# Altium PCB PCB.PcbDoc (part 1 of 2)
Units mm, origin at the board's own origin, x right, y up, seen from the top; angles counter-clockwise.
Board outline 210 x 83 mm, 4 copper layers (Top Layer, Inner Top, Inner Bottom, Bottom Layer), stack 1.536 mm thick; 158 components, 82 nets, 475 pads, 389 vias.
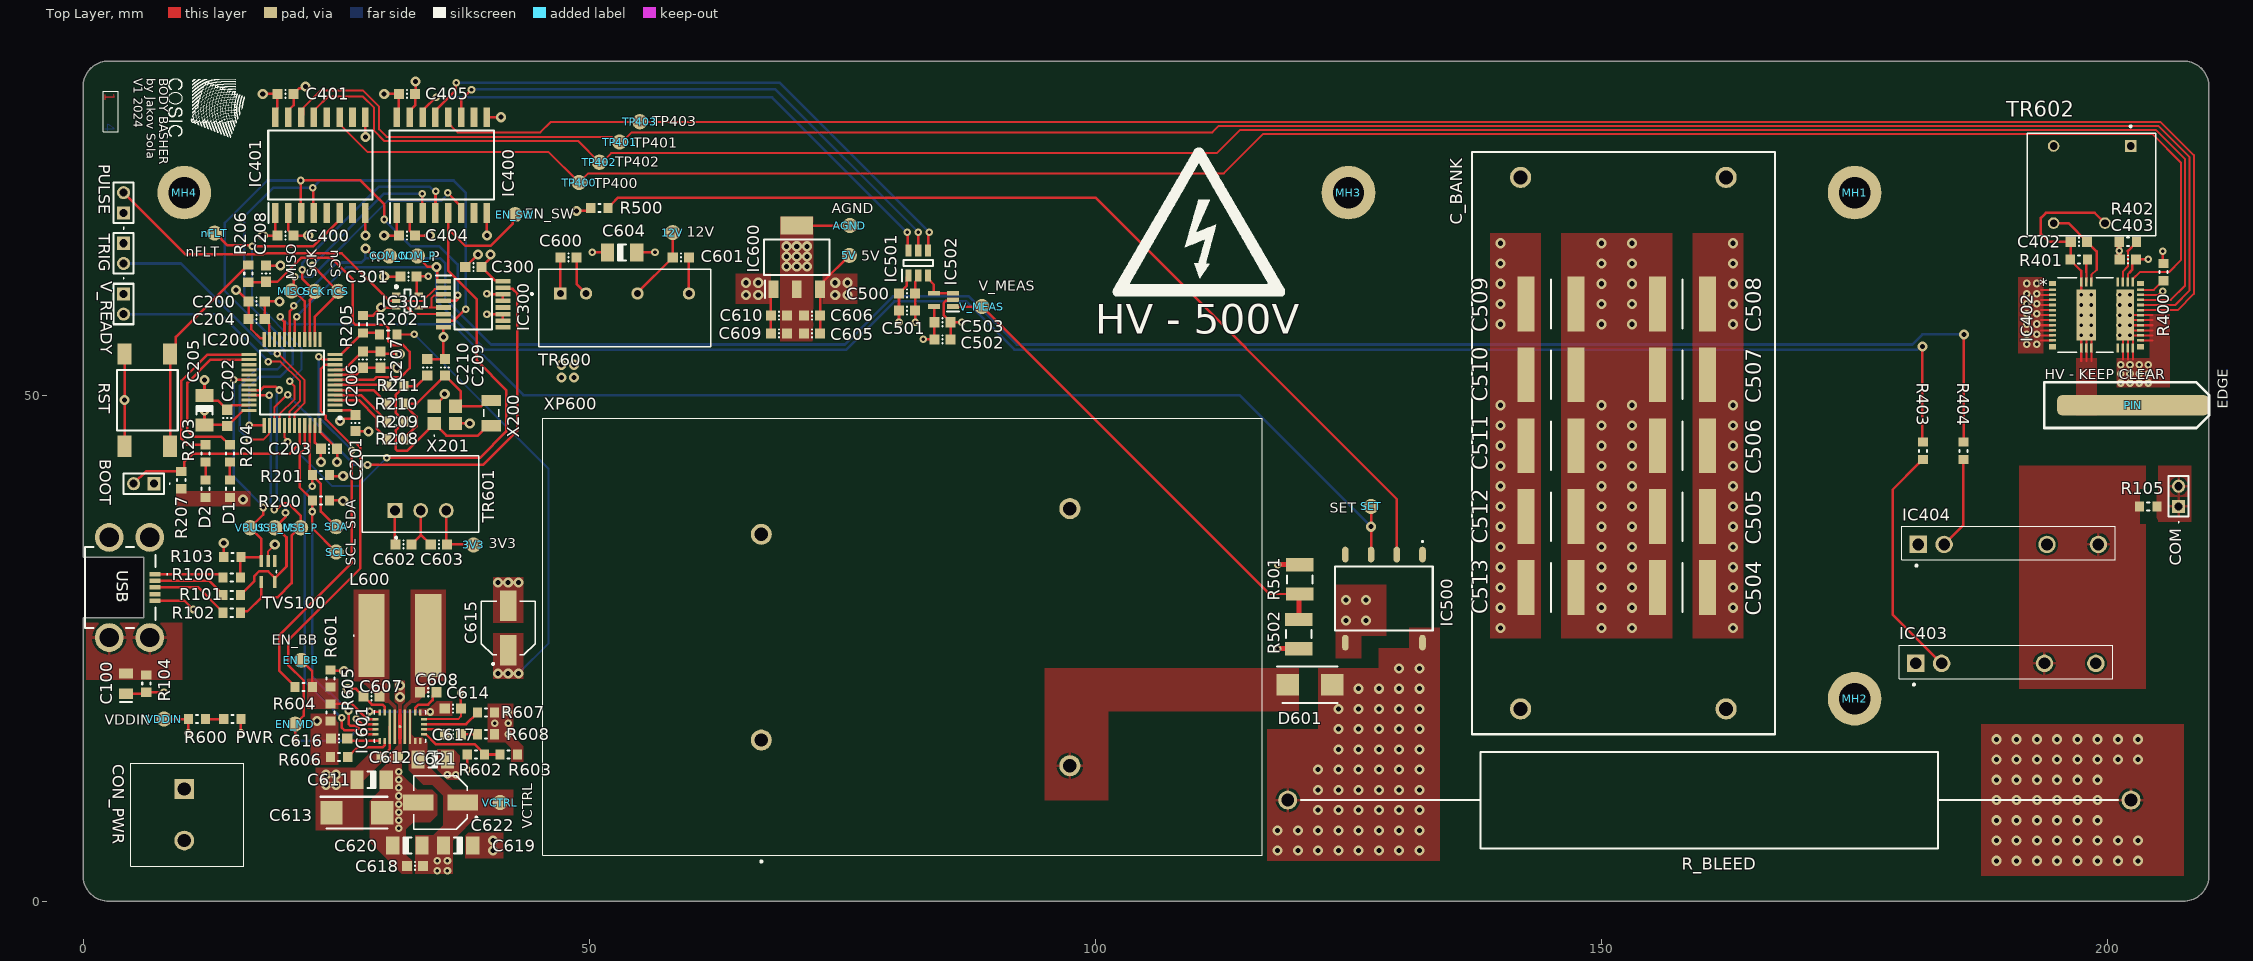
[diagram p0: Top Layer view]
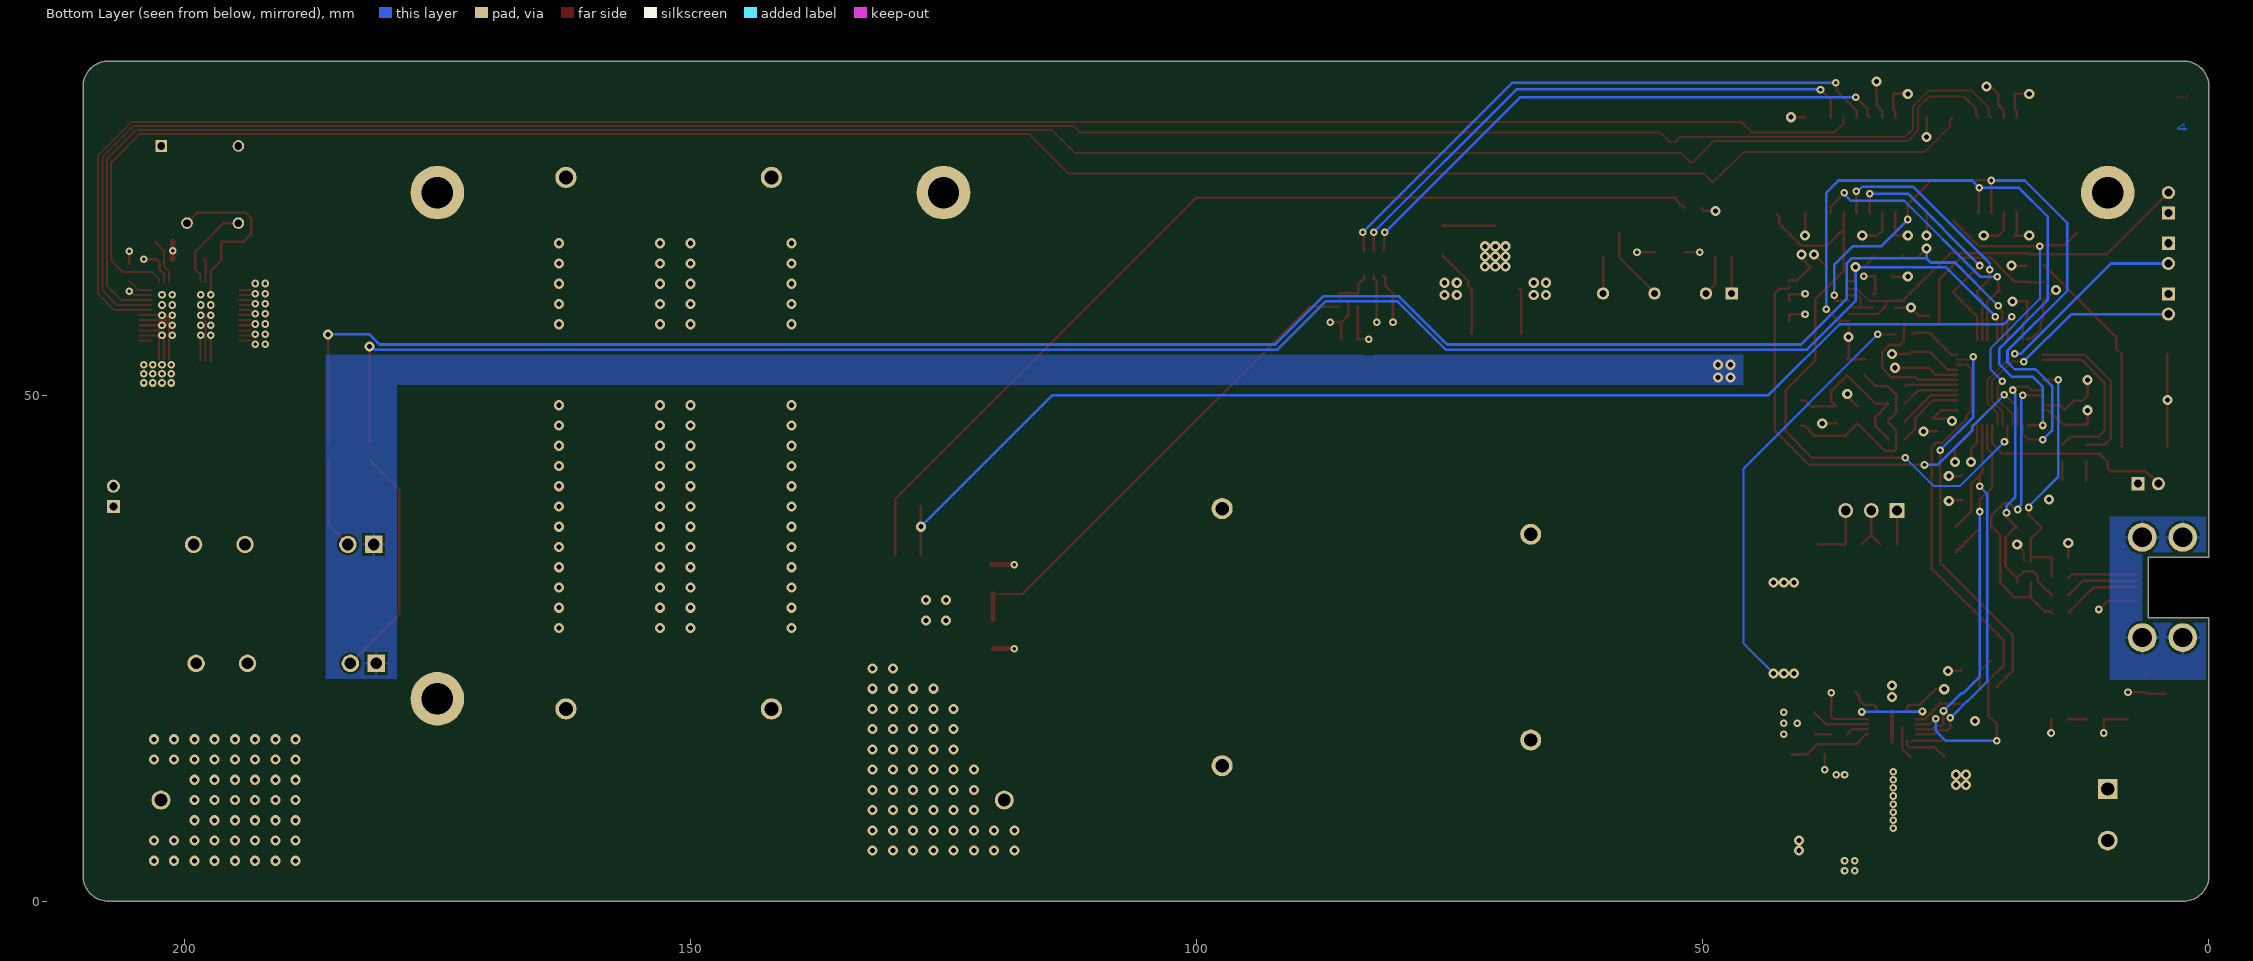
[diagram p1: Bottom Layer view, seen from below]
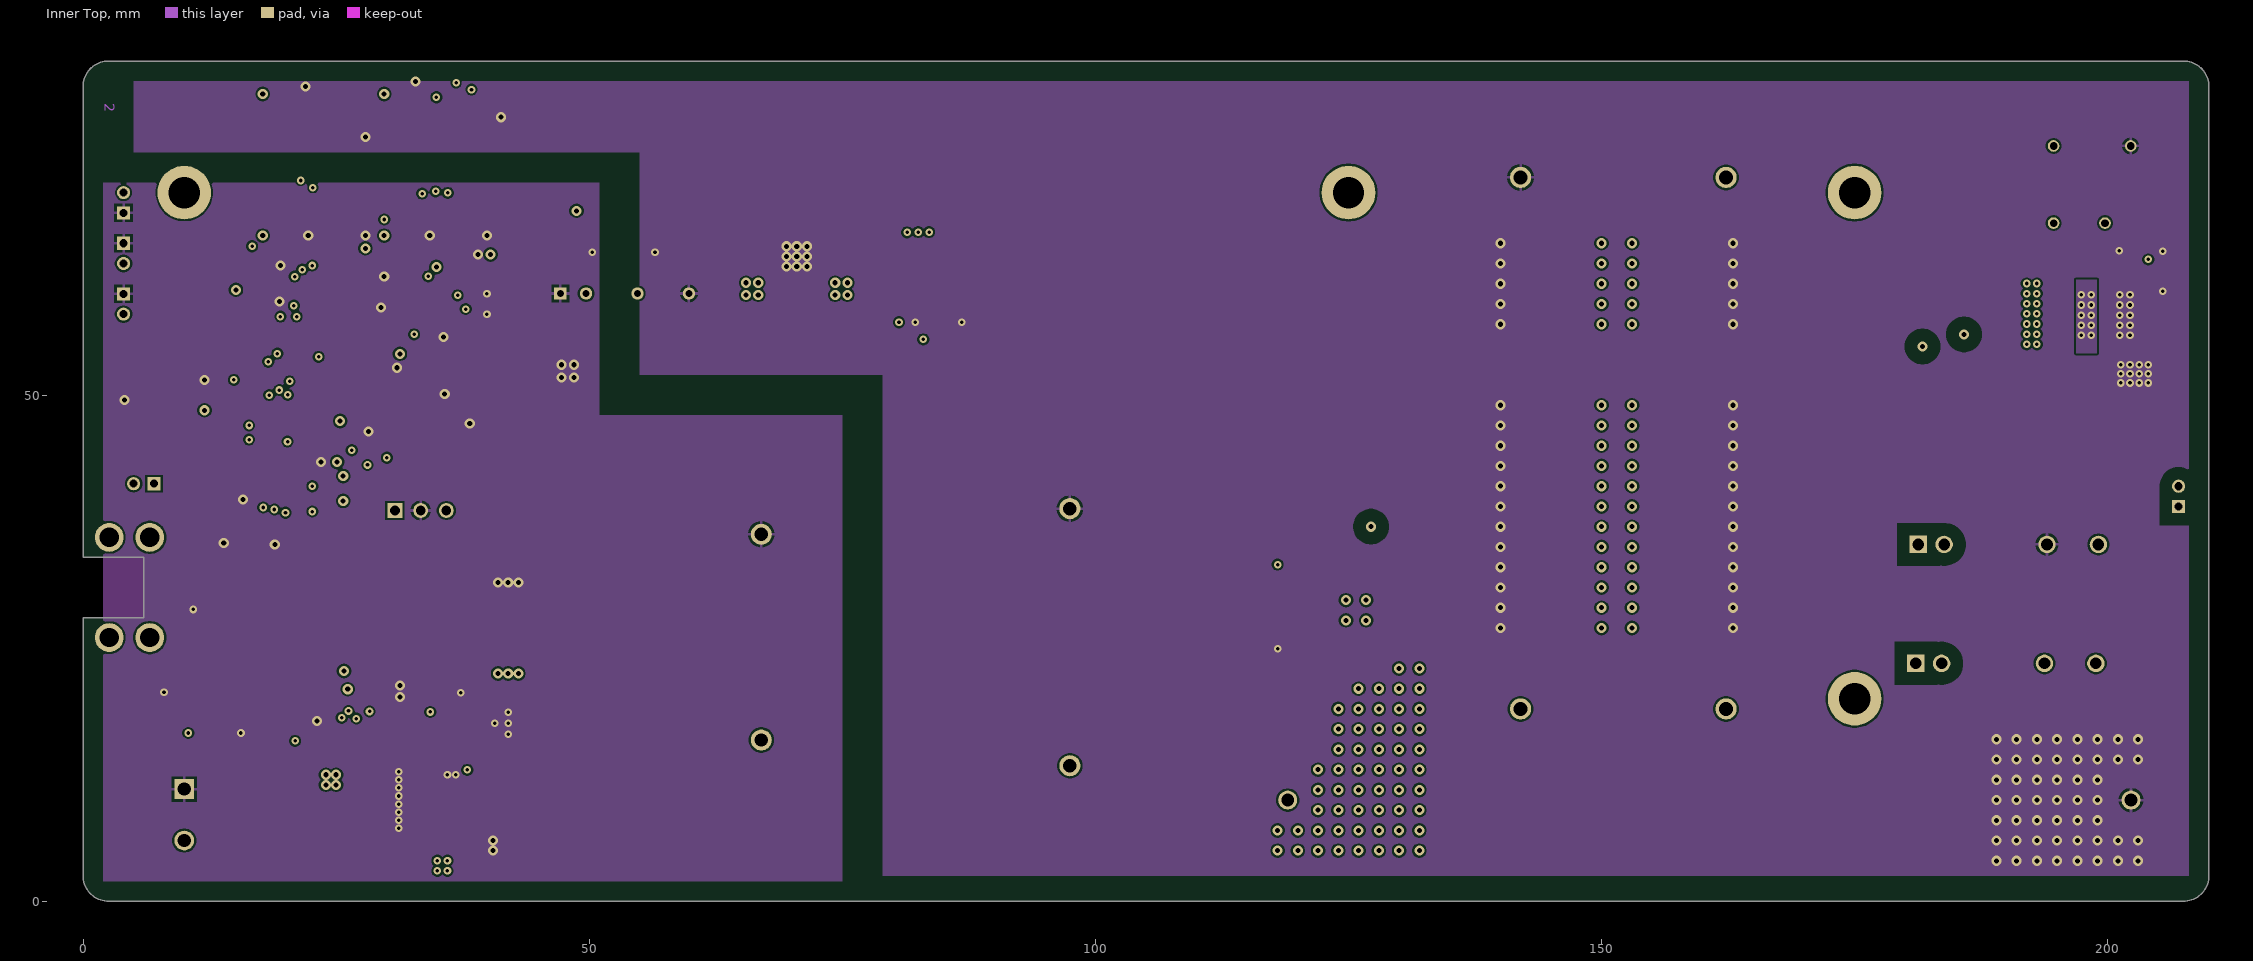
[diagram p2: Inner Top]
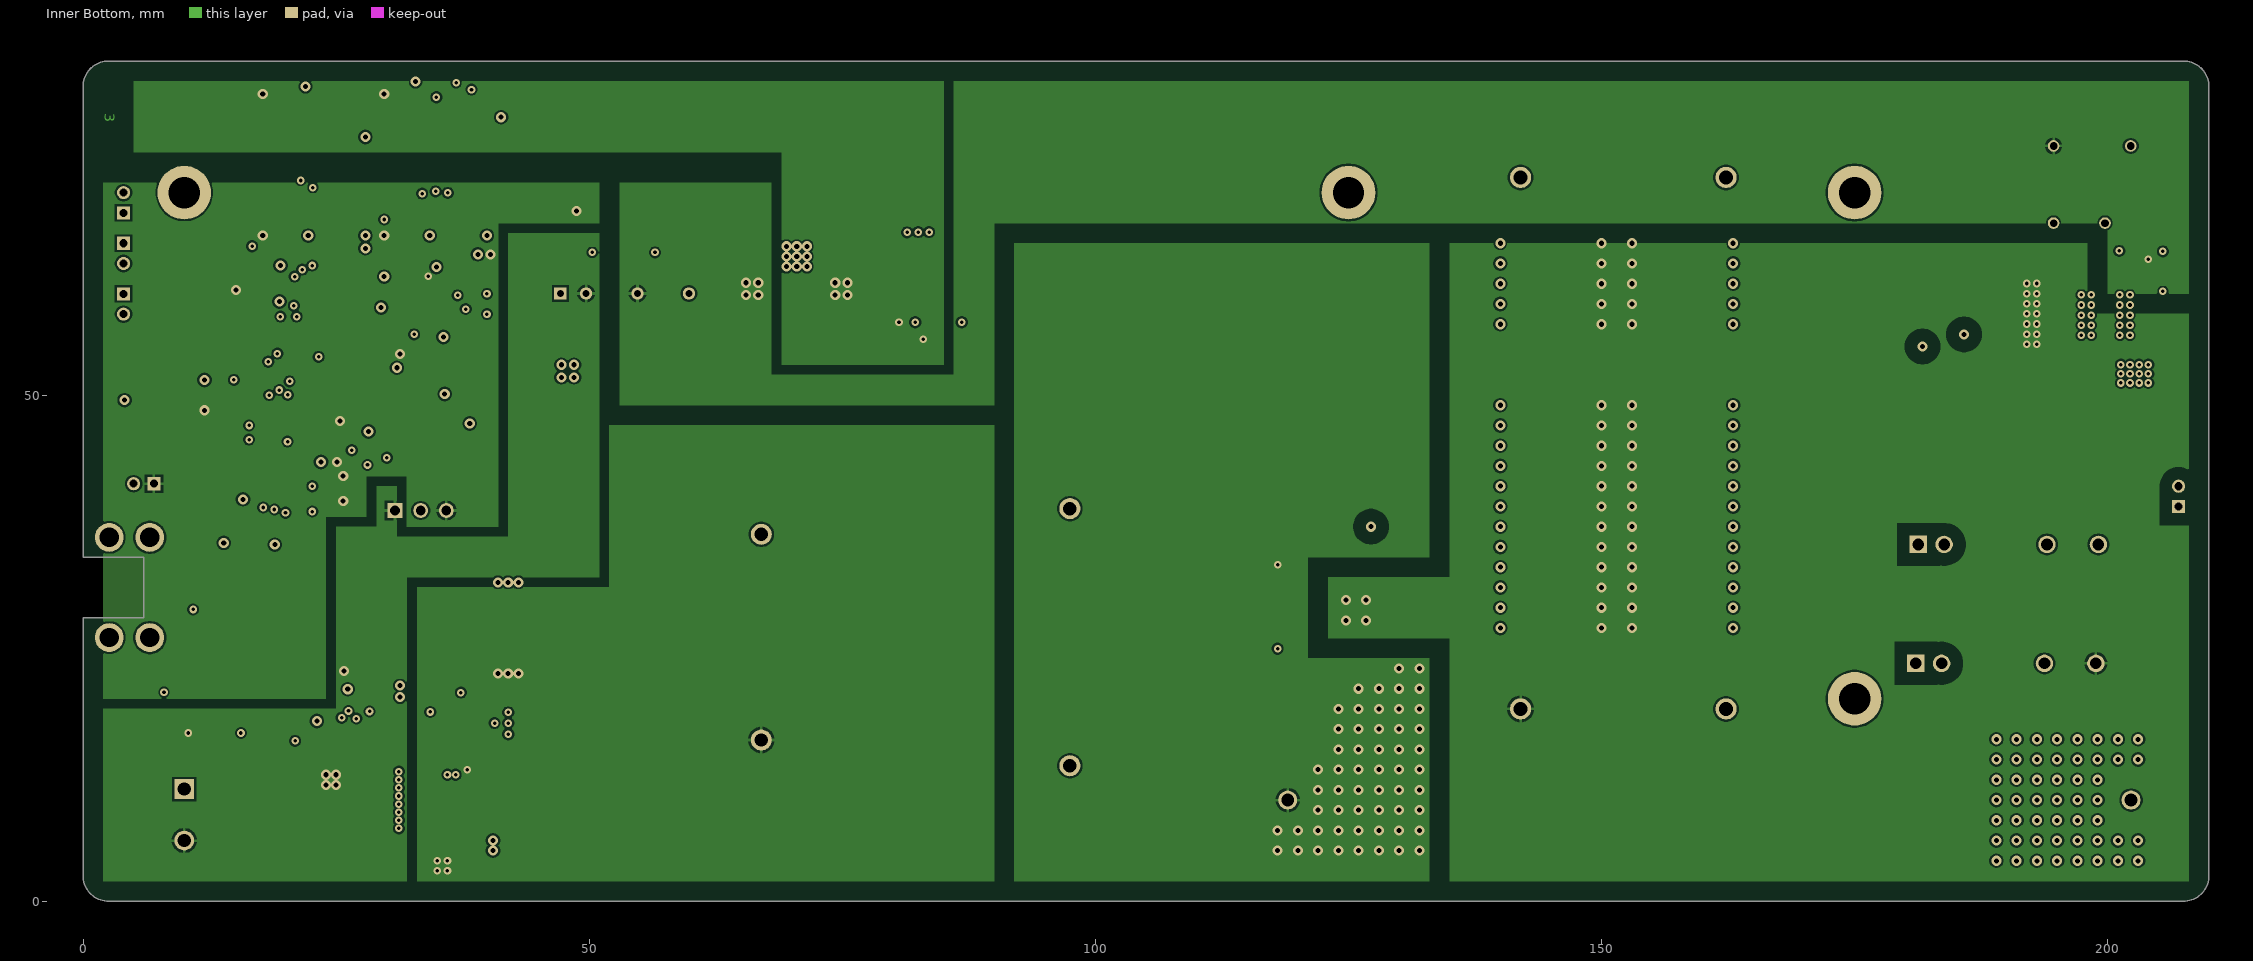
[diagram p3: Inner Bottom]

## Layer stack, top to bottom
Top Solder: solder mask 0.0127, Solder Resist, Dk 3.3
Top Layer: signal copper 0.018
Dielectric 1: prepreg 0.18, PP-006, Dk 4.1
Dielectric 2: prepreg 0.18, PP-006, Dk 4.1
Inner Top: signal copper 0.035
Dielectric1: core 0.71, FR-4, Dk 4.3
Inner Bottom: signal copper 0.035
Dielectric 3: prepreg 0.18, PP-006, Dk 4.1
Dielectric 4: prepreg 0.18, PP-006, Dk 4.1
Bottom Layer: signal copper 0.018
Bottom Solder: solder mask 0.0127, Solder Resist, Dk 3.3

## Board outline
0,34 6,34 6,28 0,28 0,2.54 ccw(c2.54,2.54) 2.54,0 207.46,0 ccw(c207.46,2.54) 210,2.54 210,80.46 ccw(c207.46,80.46) 207.46,83 2.54,83 ccw(c2.54,80.46) 0,80.46

## Design rules (kind name [scope] priority, off if disabled: settings)
Clearance ISOLATED [InNetClass('ISOLATED') vs NOT InNetClass('ISOLATED') and InAnyNet] p1: gap=1.25 ignorepadtopadclearanceinfootprint=TRUE
Clearance [All] p2: gap=0.2 ignorepadtopadclearanceinfootprint=FALSE
Clearance HV [InNetClass('HV')] p3: gap=1.25 ignorepadtopadclearanceinfootprint=TRUE
ComponentClearance [All] p1: gap=0.25 collisioncheckmode=3 verticalgap=2540 showdistances=FALSE donotcheckwithout3dbody=TRUE
DiffPairsRouting [All] p1: maxlimit=0.3 minlimit=0.2 mostfreqgap=0.25 toplayer_minwidth=0.2 toplayer_maxwidth=0.254 toplayer_prefwidth=0.254 midlayer1_minwidth=0.2 midlayer1_maxwidth=0.254 midlayer1_prefwidth=0.254 midlayer2_minwidth=0.2 midlayer2_maxwidth=0.254 midlayer2_prefwidth=0.254 bottomlayer_minwidth=0.2 bottomlayer_maxwidth=0.254 bottomlayer_prefwidth=0.254 maxuncoupledlength=10
Height [All] p1 off: minheight=0 maxheight=25.4 prefheight=12.7
HoleSize [All] p1: absolutevalues=TRUE maxlimit=5 minlimit=0.35 maxpercent=80.000 minpercent=20.000
HoleToHoleClearance [All] p1: gap=0.45 allowstackedmicrovias=TRUE
MinimumAnnularRing [All] p1: minimumring=0.15
MinimumSolderMaskSliver [All] p1: minsoldermaskwidth=0.075
PasteMaskExpansion [All] p1: expansion=0.254
PlaneClearance [All] p1: clearance=0.25
PlaneConnect [All] p1: pad.planeconnectstyle=Relief pad.reliefexpansion=0.508 pad.reliefentries=4 pad.reliefconductorwidth=0.254 pad.reliefairgap=0.254 via.planeconnectstyle=Direct via.reliefexpansion=0.508 via.reliefentries=4 via.reliefconductorwidth=0.254 via.reliefairgap=0.254
PolygonConnect [All] p1: thpad.connectstyle=Relief thpad.reliefconductorwidth=0.3 thpad.reliefentries=4 thpad.polygonreliefangle="90 Angle" thpad.airgapwidth=0.25 smdpad.connectstyle=Direct smdpad.reliefconductorwidth=0.25 smdpad.reliefentries=4 smdpad.polygonreliefangle="90 Angle" smdpad.airgapwidth=0.25 via.connectstyle=Direct via.reliefconductorwidth=0.254 via.reliefentries=4 via.polygonreliefangle="90 Angle" via.airgapwidth=0.254
RoomDefinition SWITCHING_1 [InComponentClass('SWITCHING1')] p1: confinementstyle=ConfineIn formatcopy=TRUE lockcomponents=FALSE outline 11.746,64.746 11.746,67.254 17.67,67.254 17.67,78.95 18.15,78.95 18.15,80.8 33.85,80.8 33.85,78.95 41.22,78.95 41.22,78.254 56.254,78.254 56.254,75.746 54.254,75.746 54.254,73.746 52.254,73.746 52.254,71.746 50.254,71.746 50.254,69.746 43.929,69.746 43.929,66.571 41.22,66.571 41.22,66.5 33.85,66.5 33.85,64.7 18.15,64.7 18.15,64.746
RoomDefinition CAP_BANK [InComponentClass('CAP_BANK')] p2: confinementstyle=ConfineIn formatcopy=TRUE lockcomponents=FALSE outline 49.15,67.45 49.15,69.55 135.85,69.55 135.85,75.3 168.45,75.3 168.45,15.39 203.763,15.39 203.763,4.61 117.538,4.61 117.538,54.45 83.05,54.45 83.05,56.15 83.05,57.3 79.55,57.3 79.55,67.45
RoomDefinition SWITCHING [InComponentClass('SWITCHING')] p3: confinementstyle=ConfineIn formatcopy=TRUE lockcomponents=FALSE outline 28,62.496 28,65.004 195.3,65.004 195.3,66.2 203.835,66.2 203.835,64 206.55,64 206.55,60.3 204.186,60.3 204.186,53.625 202.031,53.625 202.031,31.75 201.781,31.75 201.781,20 178.099,20 178.099,62.496
RoomDefinition PSU [InComponentClass('PSU')] p4: confinementstyle=ConfineIn formatcopy=TRUE lockcomponents=FALSE outline 3.4,2.16 3.4,14.92 6.746,14.92 6.746,19.254 19.95,19.254 19.95,22.2 20.296,22.2 20.296,25.054 25.925,25.054 25.925,31.65 27.075,31.65 27.075,44.55 43.882,44.55 43.882,62.935 46.1,62.935 46.1,64.65 50.6,64.65 50.6,65.55 56.996,65.55 56.996,67.304 66.625,67.304 66.625,68.15 74.375,68.15 74.375,68.004 77.004,68.004 77.004,48.11 116.85,48.11 116.85,23.895 125.025,23.895 125.025,18.905 116.85,18.905 116.85,3.48 34.65,3.48 34.65,2.45 17.2,2.45 17.2,2.16
RoomDefinition PULSE_MUX [InComponentClass('PULSE_MUX')] p5: confinementstyle=ConfineIn formatcopy=TRUE lockcomponents=FALSE outline 30.024,57.627 30.024,61.202 30.303,61.202 30.303,62.752 36.703,62.752 36.703,63.698 40.403,63.698 40.403,62.177 42.734,62.177 42.734,55.902 34.334,55.902 34.334,57.627
RoomDefinition CTRL [InComponentClass('CTRL')] p6: confinementstyle=ConfineIn formatcopy=TRUE lockcomponents=FALSE outline 2.7,38.95 2.7,43.55 2.902,43.55 2.902,55.604 15.15,55.604 15.15,56.75 15.275,56.75 15.275,63.85 17.375,63.85 19.125,63.85 19.125,61.529 21.854,61.529 21.854,61.504 26.454,61.504 26.454,58.85 28.7,58.85 28.7,57.05 32,57.05 32,54.6 36.8,54.6 36.8,50.85 38.75,50.85 38.75,50.55 41.8,50.55 41.8,45.9 38.75,45.9 38.75,45.25 32.7,45.25 32.7,44.594 26.254,44.594 26.254,33.246 23.746,33.246 23.746,35.646 15.246,35.646 15.246,38.9 11.05,38.9 11.05,38.95
RoutingVias [All] p1 off: holewidth=0.35 width=0.5 viastyle="Through Hole" minholewidth=0.35 minwidth=0.5 maxholewidth=1.85 maxwidth=2 viatemplateguid#1={ECC9A79C-AC3A-4F40-9B53-026DA771EB67} viatemplatename#1=v50h35m55
SMDNeckDown [CompPinCount_Surface = 2] p1: percent=100.000
SilkToSilkClearance [All] p1 off: silktosilkclearance=0.254
SilkToSolderMaskClearance [IsPad] p1 off: minsilkscreentomaskgap=0.254 clearancetoexposedcopper=TRUE
SolderMaskExpansion [All] p1: expansion=0.254 istentingtop=FALSE
SupplyNets "Schematic Supply Nets_3" [InNet('VDDIN')] p1: voltage=12.00
SupplyNets "Schematic Supply Nets_2" [InNet('VDD12V')] p2: voltage=5.000
SupplyNets "Schematic Supply Nets_1" [InNet('VDD5V')] p3: voltage=3.300
SupplyNets "Schematic Supply Nets" [InNet('VDD3V3')] p4: voltage=3.300
Width [All] p1: maxlimit=1 minlimit=0.2 preferedwidth=0.25
19 further rules are at their usual default settings.

## Classes and differential pairs
net class ISOLATED: +VBST AGND COM EN_SW_ISO HV HV_P NetD601_1 NetIC402_32 NetIC402_36 NetIC402_39 NetIC501_3 nFLT_ISO PULSE_H_ISO PULSE_L_ISO SPI_ADC_ISO.CLK SPI_ADC_ISO.DATA SPI_ADC_ISO.nCS SW V_MEAS VDD5V VDD12V
net class HV: HV HV_P SW
component class SWITCHING1: C400 C401 C404 C405 EN_SW IC400 IC401 nFLT TP400 TP401 TP402 TP403
component class TOP: C100 COM PIN PULSE R100 R101 R102 R103 R104 R105 TRIG TVS100 USB V_READY
component class SWITCHING: C402 C403 COM_N COM_P IC402 IC403 IC404 R400 R401 R402 R403 R404
component class PULSE_MUX: C300 C301 IC300 IC301
component class PSU: 3V3 5V 12V AGND C600 C601 C602 C603 C604 C605 C606 C607 C608 C609 C610 C611 C612 C613 C614 C615 C616 C617 C618 C619 C620 C621 C622 CON_PWR D601 EN_BB EN_MD IC600 IC601 L600 PWR R600 R601 R602 R603 R604 R605 R606 R607 R608 TR600 TR601 VCTRL VDDIN XP600
component class CTRL: BOOT C200 C201 C202 C203 C204 C205 C206 C207 C208 C209 C210 D1 D2 IC200 MISO nCS R200 R201 R202 R203 R204 R205 R206 R207 R208 R209 R210 R211 RST SCK SCL SDA USB_M USB_P VBUS X200 X201
component class CAP_BANK: C500 C501 C502 C503 C504 C505 C506 C507 C508 C509 C510 C511 C512 C513 C_BANK IC500 IC501 IC502 R500 R501 R502 R_BLEED SET V_MEAS
differential pair USB.D: +USB.D_P -USB.D_N

## Components (designator, comment, footprint, x,y, rotation, side; value= is the part's Value field where it differs from the comment)
3V3 "TP" TP 38.575,35.2 r180 top
5V "TP" TP 75.7,63.8 r0 top
12V "TP" TP 58.25,66.05 r0 top
AGND "TP" TP 75.75,66.75 r90 top
BOOT "CON_2P" 2MMHBS02VT02HTB 7,41.25 r180 top
C100 "Cap" CAPC0805N 4.25,21.5 r90 top
C200 "Cap" CAPC0603N 17.15,59.25 r180 top value=100N
C201 "Cap" CAPC0603N 26.9,47.25 r90 top value=100N
C202 "Cap" CAPC0603N 14.25,47.75 r270 top value=100N
C203 "Cap" CAPC0603N 24.3,44.7 r0 top value=100N
C204 "Cap" CAPC0603N 17.15,57.5 r180 top value=100N
C205 "Cap" CAPC1206N 12,48.5 r270 top value=04U7
C206 "Cap" CAPC0603N 27.65,53.5 r90 top value=10N
C207 "Cap" CAPC0603N 29.4,53.5 r90 top
C208 "Cap" CAPC0603N 18.075,62 r270 top value=22N
C209 "Cap" CAPC0603N 35.75,52.75 r270 top value=15P
C210 "Cap" CAPC0603N 34,52.75 r270 top value=15P
C300 "Cap" CAPC0603N 38.553,62.648 r0 top value=100N
C301 "Cap" CAPC0603N 32.153,61.702 r0 top value=100N
C400 "Cap" CAPC0603N 20,65.75 r180 top value=100N
C401 "Cap" CAPC0603N 20,79.75 r0 top value=100N
C402 "Cap" CAPC0603N 197.15,65.15 r0 top value=10N
C403 "Cap" CAPC0603N 201.985,63.4 r0 top value=33N
C404 "Cap" CAPC0603N 32,65.75 r180 top value=100N
C405 "Cap" CAPC0603N 32,79.75 r0 top value=100N
C500 "Cap" CAPC0603N 81.4,60.05 r0 top value=100N
C501 "Cap" CAPC0603N 81.4,58.35 r180 top value=10N
C502 "Cap" CAPC0603N 84.9,55.5 r0 top value=100N
C503 "Cap" CAPC0603N 84.9,57.2 r180 top
C504 "Cap" CAPC2220N 158,31 r180 top value=1U
C505 "Cap" CAPC2220N 158,38 r180 top value=1U
C506 "Cap" CAPC2220N 158,45 r180 top value=1U
C507 "Cap" CAPC2220N 158,52 r180 top value=1U
C508 "Cap" CAPC2220N 158,59 r180 top value=1U
C509 "Cap" CAPC2220N 145,59 r0 top value=1U
C510 "Cap" CAPC2220N 145,52 r0 top value=1U
C511 "Cap" CAPC2220N 145,45 r0 top value=1U
C512 "Cap" CAPC2220N 145,38 r0 top value=1U
C513 "Cap" CAPC2220N 145,31 r0 top value=1U
C600 "Cap" CAPC0603N 47.95,63.6 r0 top value=10U
C601 "Cap" CAPC0603N 59.05,63.6 r180 top value=10U
C602 "Cap" CAPC0603N 31.65,35.25 r180 top value=100N
C603 "Cap" CAPC0603N 35.15,35.25 r0 top value=220N
C604 "Cap" CAPC1206N 53.25,64.1 r0 top
C605 "Cap" CAPC0603N 72,56.1 r0 top value=100N
C606 "Cap" CAPC0603N 72,57.85 r0 top
C607 "Cap" CAPC0603N 28.5,20.25 r0 top value=100N
C608 "Cap" CAPC0603N 34.1,20.65 r180 top value=100N
C609 "Cap" CAPC0603N 68.75,56.1 r180 top
C610 "Cap" CAPC0603N 68.75,57.85 r180 top value=100N
C611 "Cap" CAPC1206N 28.5,12 r180 top value=22U0
C612 "Cap" CAPC0603N 30.3,14.25 r180 top
C613 "CapPol" C 27.05,8.75 r0 top value=10U
C614 "Cap" CAPC0603N 36.525,19.025 r180 top value=04U7
C615 "CapPol" 20SVPF56MX 42,27 r90 top value=56U
C616 "Cap" CAPC0603N 25.3,16.075 r180 top
C617 "Cap" CAPC0603N 36.55,16.5 r180 top value=68N
C618 "Cap" CAPC0603N 32.8,3.5 r0 top
C619 "Cap" CAPC1206N 37.05,5.5 r180 top value=33U
C620 "Cap" CAPC1206N 32.05,5.5 r0 top value=33U
C621 "Cap" CAPC1206N 34.55,14 r180 top value=33U
C622 "CapPol" 20SVPF56MX 35.3,9.75 r180 top value=56U
C_BANK "Cap" CAP_TH_15MM_RADIAL_30X58MM 142,71.5 r270 top locked value=10U
COM "CON_2P" 2MMHBS02VT02HTB 207,39 r90 top
COM_N "TP" TP 30.25,63.75 r90 top
COM_P "TP" TP 33.028,63.75 r270 top
CON_PWR "CON_2P" 1711725 10,11.08 r270 top
D1 "LED" LED0603_GREEN 14.5,40.75 r270 top
D2 "LED" LED0603_GREEN 12.1,40.75 r270 top
D601 "Diode" DIOSMB 121.2,21.4 r0 top
EN_BB "TP" TP 21.55,23.8 r90 top
EN_MD "TP" TP 20.95,17.5 r90 top
EN_SW "TP" TP 42.675,67.825 r0 top
IC200 "STM32F0" LQFP48 20.65,51.25 r180 top
IC300 "SN74LVC257APWR" SOP65P640X120-16N 38.534,58.977 r0 top
IC301 "INV_SINGLE" SOT65P212X110-5N 32.053,59.302 r0 top
IC400 "ISO7741FBDW" SOIC16 35.445,72.725 r90 top
IC401 "ISO7741FBDW" SOIC16 23.445,72.725 r90 top
IC402 "LMG2610RRGT" XLMG2610RRGT 198.9,57.9 r0 top
IC403 "SSR_SPST_NO" CPC1981Y 181.05,23.5 r0 top
IC404 "SSR_SPST_NO" CPC1981Y 181.3,35.25 r0 top
IC500 "SSR_SPST_NC" PLB171P 128.5,29.9 r180 top
IC501 "ADC101S051CIMF_NOPB" SOT95P280X145-6N 82.5,63.05 r90 top
IC502 "OPA310IDCKR" SOT65P210X110-5N 85,59.4 r180 top
IC600 "MIC2954-03WS-TR" SOT230P700X180-4N 70.5,63.6 r90 top
IC601 "TPS55289RYQR" RYQ0021A-MFG 31.3,17.25 r0 top
L600 "Inductor" SRN80404R7Y 31.3,26.25 r0 top value=04U7
MH1 "MH" MH 175,70 r0 top
MH2 "MH" MH 175,20 r0 top
MH3 "MH" MH 125,70 r0 top
MH4 "MH" MH 10,70 r0 top
MISO "TP" TP 20.6,60.275 r180 top
nCS "TP" TP 25.2,60.25 r180 top
nFLT "TP" TP 13,66 r0 top
PIN "CON_1P" POGO 195,48 r0 top
PULSE "CON_2P" 2MMHBS02VT02HTB 4,68 r90 top
PWR "LED" LED0603_GREEN 14.75,18 r0 top
R100 "Res" RESC0603N 14.691,32 r0 top value=33K
R101 "Res" RESC0603N 14.691,30.25 r180 top value=33R
R102 "Res" RESC0603N 14.691,28.5 r180 top value=33R
R103 "Res" RESC0603N 14.75,34 r0 top value=82K
R104 "Res" RESC0603N 6.25,21.5 r90 top value=1M
R105 "Res" RESC0603N 204,39 r0 top value=33R
R200 "Res" RESC0603N 23.5,39.6 r0 top value=10K
R201 "Res" RESC0603N 23.5,42.1 r0 top value=10K
R202 "Res" RESC0603N 30.15,56 r0 top value=13K3
R203 "Res" RESC0603N 12.1,44.25 r90 top value=1K
R204 "Res" RESC0603N 14.5,44.25 r90 top value=1K
R205 "Res" RESC0603N 27.65,57 r270 top value=5K1
R206 "Res" RESC0603N 16.325,62 r90 top value=1K
R207 "Res" RESC0603N 9.7,41.6 r90 top value=1K
R208 "Res" RESC0603N 30.85,45.644 r180 top value=000R
R209 "Res" RESC0603N 30.85,47.394 r180 top value=000R
R210 "Res" RESC0603N 30.85,49.144 r180 top value=000R
R211 "Res" RESC0603N 30.85,50.894 r180 top value=470R
R400 "Res" RESC0603N 205.5,62.15 r270 top value=5K1
R401 "Res" RESC0603N 197.15,63.4 r0 top value=5K6
R402 "Res" RESC0603N 201.985,65.15 r0 top value=5K6
R403 "Res" RESC0603N 181.75,44.5 r90 top value=120R
R404 "Res" RESC0603N 185.75,44.5 r90 top value=120R
R500 "Res" RESC0603N 51,68.5 r180 top value=120R
R501 "Res" RESC1210N 120.2,31.8 r90 top value=100M
R502 "Res" RESC1210N 120.1,26.4 r90 top value=1M
R600 "Res" RESC0603N 11.25,18 r180 top value=04K7
R601 "Res" RESC0603N 24.45,22 r90 top value=680K
R602 "Res" RESC0603N 38.8,14.5 r0 top value=100K
R603 "Res" RESC0603N 42.05,14.5 r0 top value=10K5
R604 "Res" RESC0603N 21.8,21.15 r0 top value=000R
R605 "Res" RESC0603N 24.45,18.65 r90 top value=100K
R606 "Res" RESC0603N 25.3,14.25 r180 top value=47K
R607 "Res" RESC0603N 39.8,18.662 r180 top value=1K1
R608 "Res" RESC0603N 39.8,16.5 r180 top value=4K99
R_BLEED "Res" RESAD8333W107L4521D953 202.3,10 r180 top value=25K
RST "4P_BTN" FSM2J_1 6.356,49.5 r0 top
SCK "TP" TP 22.9,60.25 r180 top
SCL "TP" TP 25,34.5 r270 top
SDA "TP" TP 25,37 r270 top
SET "TP" TP 127.23,39 r0 top
TP400 "TP" TP 49,71 r0 top
TP401 "TP" TP 53,75 r0 top
TP402 "TP" TP 51,73 r0 top
TP403 "TP" TP 55,77 r0 top
TR600 "TMR1" TMR1 53.5,58.6 r0 top
TR601 "TSR05" TSR05 33.35,40.25 r0 top
TR602 "TDU1" TDU1 198.4,70.8 r180 top
TRIG "CON_2P" 2MMHBS02VT02HTB 4,65 r270 top
TVS100 "SP3003_2X" SC70_5 18.281,32.566 r270 top
USB "microUSB_CON" 476420001 3.675,31 r270 top
USB_M "TP" TP 18.941,36.9 r0 top
USB_P "TP" TP 21.5,36.9 r0 top
V_MEAS "TP" TP 88.8,58.75 r90 top
V_READY "CON_2P" 2MMHBS02VT02HTB 4,60 r270 top
VBUS "TP" TP 16.5,36.9 r0 top
VCTRL "TP" TP 41.2,9.75 r90 top
VDDIN "TP" TP 8,18 r90 top
X200 "CRY_2P" XTAL_ABS07-32.768KHZ-7-T 40.325,48.225 r90 top
X201 "CRY_4P" FC3BAEBDI80T1 35.75,48.05 r0 top
XP600 "XPF02_F60" XPF02_F60 67,15.93 r0 top

## Footprints (in the part's own frame and the unit in brackets; to place one, negate y for a bottom-side part, rotate by r counter-clockwise, add the part's x,y. Pads: shape width x height; smd on the part's side, far side on the other; paste and mask are expansions set on the pad)
2MMHBS02VT02HTB [mm]
  rect 1.3x1.3 hole 0.8: 1(0,0)
  round 1.3 hole 0.8: 2(2,0)
  silkscreen extent -1.6,-1 3,1, body extent -0.98,-1 3.02,1, height 5.5
20SVPF56MX [mm]
  rect 3x1.6 smd: 1(-2.2,0) 2(2.2,0)
  silkscreen extent -3.65,-2.65 2.65,2.65, body extent -2.87,-2.65 3.13,2.65, height 5.9
1711725 [mm]
  rect 1.95x1.95 hole 1.3: 1(0,0)
  round 1.95 hole 1.3: 2(5.08,0)
  silkscreen extent -2.54,-5.3 7.62,5.9, body extent -3.08,-5.36 7.65,5.84, height 18.29
476420001 [mm]
  rect 0.45x1.1 smd: 1(-1.3,3.435) 2(-0.65,3.435) 3(0,3.435) 4(0.65,3.435) 5(1.3,3.435)
  round 2.85 hole 1.9: MH1(-4.95,2.915) MH2(-4.95,-1.085) MH3(4.95,-1.085) MH4(4.95,2.915)
  silkscreen extent -4,-3.46 4,4.7, body extent -5.1,-3.68 5.1,3.55, height 2.01
C [mm]
  rect 2.2x2.3 smd: 1(-2.5,0) 2(2.5,0)
  silkscreen extent -3.6,-1.58 3,1.58, body extent -3,-1.58 3,1.58, height 2.8
CAP_TH_15MM_RADIAL_30X58MM [mm]
  round 2.1 hole 1.4: 1(0,0) 2(52.5,0) 3(52.5,20.3) 4(0,20.3)
  silkscreen extent -2.5,-4.8 55,25.15, body extent -2.54,-4.84 54.96,25.16, height 45.1
CAPC0603N [mm] "Chip Capacitor, Body 1.6x0.8mm, IPC Medium Density"
  rect 1x1 smd: 1(-0.8,0) 2(0.8,0)
  silkscreen extent 0,-0.4 0,0.4, body extent -0.8,-0.4 0.8,0.4, height 0.82
CAPC0805N [mm] "Chip Capacitor, 2-Leads, Body 2.0x1.3mm, IPC Medium Density"
  rect 1x1.4 smd: 1(-1,0) 2(1,0)
  silkscreen extent -1.8,-0.6 -1.8,0.6, body extent -1.25,-0.62 1.25,0.62, height 0.79
CAPC1206N [mm] "Chip Capacitor, Body 3.2x1.6mm, IPC Medium Density"
  rect 1.3x1.8 smd: 1(-1.45,0) 2(1.45,0)
  silkscreen extent -0.4,-0.8 0.4,0.8, body extent -2,-0.8 2,0.8, height 1.53
CAPC2220N [mm]
  rect 1.66x5.41 smd: 1(-2.47,0) 2(2.47,0)
  silkscreen extent 0,-2.4 0,2.4, body extent -2.85,-2.5 2.85,2.5, height 3.4
CPC1981Y [mm]
  rect 1.725x1.725 hole 1.15: 1(0,0)
  round 1.725 hole 1.15: 2(2.54,0) 3(12.7,0) 4(17.78,0)
  silkscreen extent -1.65,-2.2 19.43,1.78, body extent -1.65,-1.52 19.43,1.78, height 11.53
DIOSMB [mm]
  rect 2.2x2.15 smd: 1(-2.2,0) 2(2.2,0)
  silkscreen extent -3.27,-1.81 2.7,1.81, body extent -2.7,-1.81 2.7,1.81, height 2.44
FC3BAEBDI80T1 [mm]
  rect 1.3x1.3 smd: 1(-1.05,-0.85) 2(1.05,-0.85) 3(1.05,0.85) 4(-1.05,0.85)
  silkscreen extent -1.1,-2.1 -1,-2, body extent -1.37,-1.6 1.37,1.6, height 0.9
FSM2J_1 [mm]
  rect 1.4x2.1 smd: 1(2.25,4.55) 2(2.25,-4.55) 3(-2.25,4.55) 4(-2.25,-4.55)
  silkscreen extent -3,-3 3,3, body extent -3,-5 3,5, height 4.41
LED0603_GREEN [mm]
  rect 0.9x1 smd: 1(-0.85,0) 2(0.85,0)
  silkscreen extent -0.1,-0.4 0.1,0.4, body extent -0.8,-0.4 0.8,0.4, height 0.45
LQFP48 [mm]
  rect 1.475x0.3 smd mask-2539.97: 1(-4.238,2.75) 2(-4.238,2.25) 3(-4.238,1.75) 4(-4.238,1.25) 5(-4.238,0.75) 6(-4.238,0.25) 7(-4.238,-0.25) 8(-4.238,-0.75) 9(-4.238,-1.25) 10(-4.238,-1.75) 11(-4.238,-2.25) 12(-4.238,-2.75) 25(4.238,-2.75) 26(4.238,-2.25) 27(4.238,-1.75) 28(4.238,-1.25) 29(4.238,-0.75) 30(4.238,-0.25) 31(4.238,0.25) 32(4.238,0.75) 33(4.238,1.25) 34(4.238,1.75) 35(4.238,2.25) 36(4.238,2.75)
  rect 0.3x1.475 smd mask-2539.97: 13(-2.75,-4.238) 14(-2.25,-4.238) 15(-1.75,-4.238) 16(-1.25,-4.238) 17(-0.75,-4.238) 18(-0.25,-4.238) 19(0.25,-4.238) 20(0.75,-4.238) 21(1.25,-4.238) 22(1.75,-4.238) 23(2.25,-4.238) 24(2.75,-4.238) 37(2.75,4.238) 38(2.25,4.238) 39(1.75,4.238) 40(1.25,4.238) 41(0.75,4.238) 42(0.25,4.238) 43(-0.25,4.238) 44(-0.75,4.238) 45(-1.25,4.238) 46(-1.75,4.238) 47(-2.25,4.238) 48(-2.75,4.238)
  silkscreen extent -4.85,-3.15 3.15,3.62, body extent -4.5,-4.5 4.5,4.5, height 1.6
MH [mm]
  round 5.3 hole 3.1: 1(0,0)
PLB171P [mm]
  oval 0.65x1.55 smd: 1(-3.81,-4.35) 2(-1.27,-4.35) 3(1.27,-4.35) 4(3.81,-4.35) 5(3.81,4.35) 8(-3.81,4.35)
  silkscreen extent -4.83,-5.7 4.83,3.18, body extent -4.83,-3.1 4.83,3.25, height 2.39
POGO [mm]
  rrect50% 15x2 smd: 1(7.5,1)
  silkscreen extent -1.25,-1.25 15,3.25, body extent 1.9,0.32 26.6,1.68, height 0.68
RESAD8333W107L4521D953 [mm]
  round 1.875 hole 1.25: 1(0,0) 2(83.3,0)
  silkscreen extent 1.29,-4.76 82.01,4.76, body extent -0.54,-5.14 83.87,5.14, height 15.32
RESC0603N [mm] "Chip Resistor, Body 1.6x0.8mm, IPC Medium Density"
  rect 0.9x1 smd: 1(-0.85,0) 2(0.85,0)
  silkscreen extent -0.1,-0.4 0.1,0.4, body extent -0.8,-0.4 0.8,0.4, height 0.45
RESC1210N [mm] "Chip Resistor, Body 3.2x2.5mm, IPC Medium Density"
  rect 1.3x2.7 smd: 1(-1.45,0) 2(1.45,0)
  silkscreen extent -0.4,-1.25 0.4,1.25, body extent -2,-1.24 2,1.24, height 1.7
RYQ0021A-MFG [mm]
  rect 0.6x0.24 smd paste+0 mask+0: 1(-2.4,0.75) 2(-2.4,0.25) 3(-2.4,-0.25) 4(-2.4,-0.75) 14(2.4,-0.75) 15(2.4,-0.25) 16(2.4,0.25) 17(2.4,0.75)
  rect 0.24x0.6 smd paste+0 mask+0: 5(-2,-1.4) 6(-1.5,-1.4) 12(1.5,-1.4) 13(2,-1.4) 18(2,1.4) 19(1.5,1.4) 20(-1.5,1.4) 21(-2,1.4)
  rect 0.24x3.4 smd paste-1.687 mask+0: 7(-1,0) 8(-0.5,0) 10(0.5,0) 11(1,0)
  round 0.297 smd paste-0.136 mask+0: 9(0,0)
  Top Layer region: -0.12,-1.175 -0.165,-1.175 -0.165,1.175 -0.12,1.175 -0.12,1.65 -0.07,1.7 0.07,1.7 0.12,1.65 0.12,1.175 0.165,1.175 0.165,-1.175 0.12,-1.175 0.12,-1.65 0.07,-1.7 -0.07,-1.7 -0.12,-1.65
  silkscreen extent -3.37,-1.55 2.55,1.55, body extent -2.5,-1.5 2.5,1.5, height 1
SC70_5 [mil]
  rect 46x14 smd: 1(-41,26) 2(-41,0) 3(-41,-26) 4(41,-26) 5(41,26)
  silkscreen extent -5,32 5,33, body extent -43,-40 43,40, height 43
SOIC16 [mm]
  rect 1.95x0.65 smd: 1(-4.725,4.445) 2(-4.725,3.175) 3(-4.725,1.905) 4(-4.725,0.635) 5(-4.725,-0.635) 6(-4.725,-1.905) 7(-4.725,-3.175) 8(-4.725,-4.445) 9(4.725,-4.445) 10(4.725,-3.175) 11(4.725,-1.905) 12(4.725,-0.635) 13(4.725,0.635) 14(4.725,1.905) 15(4.725,3.175) 16(4.725,4.445)
  silkscreen extent -5.7,-5.15 3.4,5.15, body extent -5.17,-5.15 5.17,5.15, height 2.59
SOP65P640X120-16N [mm]
  rect 1.475x0.45 smd: 1(-2.938,2.275) 2(-2.938,1.625) 3(-2.938,0.975) 4(-2.938,0.325) 5(-2.938,-0.325) 6(-2.938,-0.975) 7(-2.938,-1.625) 8(-2.938,-2.275) 9(2.938,-2.275) 10(2.938,-1.625) 11(2.938,-0.975) 12(2.938,-0.325) 13(2.938,0.325) 14(2.938,0.975) 15(2.938,1.625) 16(2.938,2.275)
  silkscreen extent -3.67,-2.5 1.85,2.85, body extent -3.2,-2.5 3.2,2.5, height 1.13
SOT65P210X110-5N [mm]
  rect 1.2x0.45 smd: 1(-0.95,0.65) 2(-0.95,0) 3(-0.95,-0.65) 4(0.95,-0.65) 5(0.95,0.65)
  silkscreen extent -1.55,1.12 -0.35,1.12, body extent -1.05,-1 1.05,1, height 1
SOT65P212X110-5N [mm] "SOT23, 5-Leads, Body 2.05x2.13mm, Pitch 0.65mm, IPC Medium Density"
  rect 0.85x0.4 smd: 1(-1.1,0.65) 2(-1.1,0) 3(-1.1,-0.65) 4(1.1,-0.65) 5(1.1,0.65)
  silkscreen extent -1.22,-1.15 0.3,1.52, body extent -1.12,-1.12 1.12,1.12, height 1.1
SOT95P280X145-6N [mm]
  rect 1.2x0.6 smd: 1(-1.25,0.95) 2(-1.25,0) 3(-1.25,-0.95) 4(1.25,-0.95) 5(1.25,0) 6(1.25,0.95)
  silkscreen extent -1.85,-1.45 0.3,1.6, body extent -1.4,-1.45 1.4,1.45, height 1.2
SOT230P700X180-4N [mm]
  rect 1.75x0.95 smd: 1(-3.15,2.3) 2(-3.15,0) 3(-3.15,-2.3)
  rect 1.75x3.25 smd: 4(3.15,0)
  silkscreen extent -4.03,-3.25 1.75,3.25, body extent -3.5,-3.25 3.5,3.25, height 1.8
SRN80404R7Y [mm]
  rect 2.6x8.2 smd: 1(-2.8,0) 2(2.8,0)
  silkscreen extent -4.6,-0.05 -4.5,0.05, body extent -4.08,-3.95 4.08,3.95, height 4
TDU1 [mm]
  rect 1.15x1.15 / inner round 1.15 / far side rect 1.15x1.15 hole 0.75: 1(-3.87,-3.81)
  round 1.15 hole 0.75: 4(3.75,-3.81) 5(3.75,3.81) 7(-1.33,3.81)
  silkscreen extent -6.35,-5.85 6.35,5.08, body extent -6.35,-5.1 6.35,5.1, height 8
TMR1 [mm]
  rect 1.218x1.218 hole 0.71: 1(-6.35,1.435)
  round 1.218 hole 0.71: 2(-3.81,1.435) 4(1.27,1.435) 6(6.35,1.435)
  silkscreen extent -9.27,-3.81 8.5,3.81, body extent -8.7,-3.88 8.7,3.88, height 11.4
TP [mm]
  round 1.5 smd: TP(0,0)
TSR05 [mm]
  rect 1.468x1.468 hole 0.96: 1(-2.54,-1.65)
  round 1.468 hole 0.96: 2(0,-1.65) 3(2.54,-1.65)
  silkscreen extent -5.75,-4.44 5.75,3.77, body extent -5.75,-3.78 5.75,3.78, height 10
XLMG2610RRGT [mil]
  rect 28x20 smd paste-14 mask-14: 1(-171.26,123.03) 13(-171.26,-123.03) 21(171.26,-123.03) 33(171.26,123.03)
  rect 28x10 smd paste+0 mask+0: 2(-171.26,98.43) 3(-171.26,78.74) 4(-171.26,59.06) 5(-171.26,39.37) 6(-171.26,19.68) 7(-171.26,0) 8(-171.26,-19.69) 9(-171.26,-39.37) 10(-171.26,-59.06) 11(-171.26,-78.74) 12(-171.26,-98.43) 22(171.26,-98.43) 23(171.26,-78.74) 24(171.26,-59.06) 25(171.26,-39.37) 26(171.26,-19.69) 27(171.26,0) 28(171.26,19.68) 29(171.26,39.37) 30(171.26,59.06) 31(171.26,78.74) 32(171.26,98.43)
  rect 10x35 smd paste+0 mask+0: 14(-59.65,-127.95) 15(-39.96,-127.95) 16(-20.28,-127.95) 17(82.09,-127.95) 18(101.77,-127.95) 19(121.46,-127.95) 20(141.14,-127.95) 34(141.14,127.95) 35(121.46,127.95) 36(101.77,127.95) 37(82.09,127.95) 38(-20.28,127.95) 39(-39.96,127.95) 40(-59.65,127.95)
  rect 77x198 smd paste+0 mask+0: 41(-40.16,0)
  rect 69x198 smd paste+0 mask+0: 42(111.61,0)
  silkscreen extent -152,-145 64,145, body extent -179,-140 179,140, height 39
XPF02_F60 [mm]
  round 2.08 hole 1.32: 1(0,0) 2(0,20.32) 3(30.48,-2.54) 4(30.48,22.86)
  silkscreen extent -21.6,-12.1 49.5,31.8, body extent -21.56,-11.25 49.56,31.93, height 21.59
XTAL_ABS07-32.768KHZ-7-T [mm]
  rect 1.1x1.9 smd: 1(-1.25,0) 2(1.25,0)
  silkscreen extent -0.38,-0.75 0.38,0.75, body extent -1.6,-0.75 1.6,0.75, height 0.89

## Part data
BOOT COM PULSE TRIG V_READY: library part 2MM-HB-S02-VT-02-H-TB, MANUF="TE CONNECTIVITY", DESCR="CON 2P 2MM HEADER", MANUFCODE=2MM-HB-S02-VT-02-H-TB, POPULATE=YES, VENDOR=MOUSER, VENDORCODE=571-2MM-HBS02VT02HTB
C100: library part "2238 600 15623", MANUF=PHYCOMP, PACKAGE=0805, TOLERANCE=0.1, VALUE_4C=01N0, VALUE_PF=1000, VOLTAGE=100V, DESCR="CAP 01N0 0805 100V X7R 10%", MANUFCODE="2238 600 15623", POPULATE=YES, TECHNOLOGY=X7R, VENDOR="FARNELL INONE", VENDORCODE=1362553
C200 C201 C202 C203 C204 C300 C301 C400 C401 C404 C405 C500 C502 C602 C605 C607 C608 C610: library part CL10B104KA8WPNC, MANUF=SAMSUNG, PACKAGE=0603, TOLERANCE=0.1, VALUE_4C=100N, VOLTAGE=25V, DESCR="CAP 100N 0603 25V X7R 10%", MANUFCODE=CL10B104KA8WPNC, POPULATE=YES, TECHNOLOGY=X7R, VENDOR=DIGI-KEY, VENDORCODE=1276-6717-1-ND
C205: library part CL31B475KBHNNNE, MANUF=SAMSUNG, PACKAGE=1206, TOLERANCE=0.1, VALUE_4C=04U7, VALUE_PF=4700000, VOLTAGE=50V, DESCR="CAP 04U7 1206 50V X7R 10%", MANUFCODE=CL31B475KBHNNNE, POPULATE=YES, TECHNOLOGY=X7R, VENDOR="FARNELL INONE", VENDORCODE=3013533
C206 C501: library part C0603C103K8RACTU, MANUF=KEMET, PACKAGE=0603, TOLERANCE=0.1, VALUE_4C=10N0, VOLTAGE=10V, DESCR="CAP 10N0 0603 10V X7R 10%", MANUFCODE=C0603C103K8RACTU, POPULATE=YES, TECHNOLOGY=X7R, VENDOR=DIGI-KEY, VENDORCODE=399-11132-1-ND
C207 C606 C609: library part C0603C105K4PAC-TU, MANUF=KEMET, PACKAGE=0603, TOLERANCE=0.1, VALUE_4C=01U0, VALUE_PF=1000000, VOLTAGE=16V, DESCR="CAP 01U0 0603 16V X5R 10%", MANUFCODE=C0603C105K4PAC-TU, POPULATE=YES, TECHNOLOGY=X5R, VENDOR="FARNELL INONE", VENDORCODE=1463388
C208: library part C0603C223K8RAC7867, MANUF=KEMET, PACKAGE=0603, TOLERANCE=0.1, VALUE_4C=22N0, VOLTAGE=10V, DESCR="CAP 22N0 0603 10V X7R 10%", MANUFCODE=C0603C223K8RAC7867, POPULATE=YES, TECHNOLOGY=X7R, VENDOR=DIGI-KEY, VENDORCODE=399-14505-1-ND
C209 C210: library part C0603C150K8RAC, MANUF=KEMET, PACKAGE=0603, TOLERANCE=0.1, VALUE_4C=15P0, VALUE_PF=15, VOLTAGE=10V, DESCR="CAP 15P0 0603 10V X7R 10%", MANUFCODE=C0603C150K8RAC, POPULATE=DNP, TECHNOLOGY=X7R
C402: library part CGA3E2C0G1H103J080AA, MANUF=TDK, PACKAGE=0603, TOLERANCE=0.05, VALUE_4C=10N0, VALUE_PF=10000, VOLTAGE=50V, DESCR="CAP 10N0 0603 50V NP0 5%", MANUFCODE=CGA3E2C0G1H103J080AA, POPULATE=YES, TECHNOLOGY=NP0, VENDOR="FARNELL INONE", VENDORCODE=2210846
C403: library part CL10B333KB8NFNC, MANUF=SAMSUNG, PACKAGE=0603, TOLERANCE=0.1, VALUE_4C=33N0, VOLTAGE=50V, DESCR="CAP 33N0 0603 50V X7R 10%", MANUFCODE=CL10B333KB8NFNC, POPULATE=YES, TECHNOLOGY=X7R, VENDOR=DIGI-KEY, VENDORCODE=1276-2040-1-ND
C503 C612 C616 C618: library part C0603C105K3PAC, MANUF=KEMET, PACKAGE=0603, TOLERANCE=0.1, VALUE_4C=01U0, VALUE_PF=1000000, VOLTAGE=25V, DESCR="CAP 01U0 0603 25V X5R 10%", MANUFCODE=C0603C105K3PAC, TECHNOLOGY=X5R, VENDOR="FARNELL INONE", VENDORCODE=1288202
  C503 C612 C618: POPULATE=YES
  C616: POPULATE=DNP
C504 C505 C506 C507 C508 C509 C510 C511 C512 C513: library part 2220CC105KAZ2A, MANUF=KOYCERA, PACKAGE=2220, TOLERANCE=0.1, VALUE_4C=01U0, VALUE_PF=1000000, VOLTAGE=600V, DESCR="CAP 01U0 2220 600V X7R 10%", MANUFCODE=2220CC105KAZ2A, POPULATE=DNP, TECHNOLOGY=X7R, VENDOR=MOUSER, VENDORCODE=581-2220CC105KAZ2A
C600 C601: library part ZRB18AR61E106ME01L, MANUF=MURATA, PACKAGE=0603, TOLERANCE=0.2, VALUE_4C=10U0, VALUE_PF=10000000, VOLTAGE=25V, DESCR="CAP 10U0 0603 25V X5R 20%", MANUFCODE=ZRB18AR61E106ME01L, POPULATE=YES, TECHNOLOGY=X5R, VENDOR="FARNELL INONE", VENDORCODE=2469398
C603: library part AC0603KRX7R6BB224, MANUF=YAGEO, PACKAGE=0603, TOLERANCE=0.1, VALUE_4C=220N, VOLTAGE=10V, DESCR="CAP 220N 0603 10V X7R 10%", MANUFCODE=AC0603KRX7R6BB224, POPULATE=YES, TECHNOLOGY=X7R, VENDOR=DIGI-KEY, VENDORCODE=311-3103-1-ND
C604: library part 1206AC102KAT2A, MANUF=AVX, PACKAGE=1206, TOLERANCE=0.1, VALUE_4C=01N0, VALUE_PF=1000, VOLTAGE=1KV, DESCR="CAP 01N0 1206 1KV X7R 10%", MANUFCODE=1206AC102KAT2A, POPULATE=YES, TECHNOLOGY=X7R, VENDOR="FARNELL INONE", VENDORCODE=1216463
C611: library part CL31A226KAHNNNE, MANUF=SAMSUNG, PACKAGE=1206, TOLERANCE=0.1, VALUE_4C=22U0, VALUE_PF=22000000, VOLTAGE=25V, DESCR="CAP 22U0 1206 25V X5R 10%", MANUFCODE=CL31A226KAHNNNE, POPULATE=YES, TECHNOLOGY=X5R, VENDOR=MOUSER, VENDORCODE=187-CL31A226KAHNNNE
C613: library part TAJC106K025RNJ, MANUF=AVX, PACKAGE=C, TOLERANCE=0.1, VALUE_4C=10U0, VALUE_PF=10000000, VOLTAGE=25V, DESCR="CAP 10U0 C 25V TANT 10%", MANUFCODE=TAJC106K025RNJ, POPULATE=YES, TECHNOLOGY=TANT, VENDOR="FARNELL INONE", VENDORCODE=197518
C614: library part GRM185R61C475KE11D, MANUF=MURATA, PACKAGE=603, TOLERANCE=0.1, VALUE_4C=04U7, VALUE_PF=4700000, VOLTAGE=16V, DESCR="CAP 04U7 0603 16V X5R 10%", MANUFCODE=GRM185R61C475KE11D, POPULATE=YES, TECHNOLOGY=X5R, VENDOR=DIGI-KEY, VENDORCODE=490-14459-1-ND
C615 C622: library part 20SVPF56MX, MANUF=PANASONIC, PACKAGE=5X5.9, TOLERANCE=0.2, VALUE_4C=56U0, VALUE_PF=56000000, VOLTAGE=20V, DESCR="CAP 56U0 5X5.9 20V 20%", MANUFCODE=20SVPF56MX, VENDOR=MOUSER, VENDORCODE=667-20SVPF56MX
  C615: POPULATE=DNP
  C622: POPULATE=YES
C617: library part C0603C683K8RACTU, MANUF=KEMET, PACKAGE=0603, TOLERANCE=0.1, VALUE_4C=68N0, VOLTAGE=10V, DESCR="CAP 68N0 0603 10V X7R 10%", MANUFCODE=C0603C683K8RACTU, POPULATE=YES, TECHNOLOGY=X7R, VENDOR=DIGI-KEY, VENDORCODE=399-9122-1-ND
C619 C620 C621: library part C3216X5R1E336M160AC, MANUF=TDK, PACKAGE=1206, TOLERANCE=0.2, VALUE_4C=33U0, VALUE_PF=33000000, VOLTAGE=25V, DESCR="CAP 33U0 1206 25V X5R 20%", MANUFCODE=C3216X5R1E336M160AC, POPULATE=YES, TECHNOLOGY=X5R, VENDOR=MOUSER, VENDORCODE=810-C3216X5R1E336M
C_BANK: library part B32928A4106K000, MANUF=EPCOS, PACKAGE=30X58, TOLERANCE=0.1, VALUE_4C=10U0, VALUE_PF=10000000, VOLTAGE=650V, DESCR="CAP 10U 30X58 650V PP 10%", MANUFCODE=B32928A4106K000, POPULATE=YES, VENDOR=MOUSER, VENDORCODE=871-B32928A4106K000
CON_PWR: library part 1711725, MANUF="PHOENIX CONTACT", DESCR="CON PHOENIX 5.08MM 2P SCREW", MANUFCODE=1711725, POPULATE=YES, VENDOR=MOUSER, VENDORCODE=651-1711725
D1 D2 PWR: library part ASMT-RF45, COLOR=GREEN, MANUF="AVAGO TECHNOLOGIES", PACKAGE=0603, DESCR="LED GREEN 0603 20MA 2.4V 60MCD", IF=20MA, INTENSITY=60MCD, MANUFCODE=ASMT-RF45, POPULATE=YES, QTY=SINGLE, REMARK=GREEN, VENDOR="FARNELL INONE", VENDORCODE=1652078, VF=2.4V
D601: library part RS2K-E3/52T, "Default Diode", MANUF=VISHAY, PACKAGE=SMB, DESCR="DIODE 800V 1.5A SMB", IF=1.5A, MANUFCODE=RS2K-E3/52T, POPULATE=YES, QTY=SINGLE, VENDOR=MOUSER, VENDORCODE=625-RS2K-E3, VR=800V
IC200: library part STM32F072CBT6, MANUF=STM, DESCR="IC MCU ARM CORTEX-M0 128KB 48MHZ USB", MANUFCODE=STM32F072CBT6, POPULATE=YES, VENDOR=FARNELL, VENDORCODE=2432094
IC300 IC400 IC401 IC502 IC601: MANUF=TI, POPULATE=YES, VENDOR=MOUSER
  IC300: DESCR="IC MUX QUAD 2:1 3 STATE", MANUFCODE=SN74LVC257APWR, VENDORCODE=595-SN74LVC257APWR
  IC400 IC401: DESCR="IC ISO 3/1 100MBPS 2.25-5.5 V", MANUFCODE=ISO7741FBDW, VENDORCODE=595-ISO7741FBDW
  IC502: DESCR="IC OPAMP 5.5V 3MHz", MANUFCODE=OPA310IDCKR, VENDORCODE=595-OPA310IDCKR
  IC601: DESCR="IC BUCK-BOOST 30V 8A I2C", MANUFCODE=TPS55289RYQR, VENDORCODE=595-TPS55289RYQR
IC301: library part 74LVC1GU04GW,125, MANUF=NEXPERIA, DESCR="IC INV SINGLE UNBUFFERED", MANUFCODE=74LVC1GU04GW,125, POPULATE=YES, VENDOR=MOUSER, VENDORCODE=771-LVC1GU04GW125
IC402: MANUF="TEXAS INSTRUMENTS", DESCR="IC INT HALF BRIDGE GAN", MANUFCODE=LMG2610RRGT, POPULATE=YES, VENDOR=MOUSER, VENDORCODE=595-LMG2610RRGT
IC403 IC404: library part CPC1981Y, MANUF=IXYS, DESCR="IC SSR SPST NO 1000V 180mA", MANUFCODE=CPC1981Y, POPULATE=YES, VENDOR=MOUSER, VENDORCODE=849-CPC1981Y
IC500: library part PLB171P, "Solid State SPST-NC (1 Form B) 8-SMD (0.300\", 7.62mm), 6 Leads", MANUF=IXYS, DESCR="IC SSR SPST NC 800V 80mA", MANUFCODE=PLB171P, POPULATE=YES, VENDOR=MOUSER, VENDORCODE=849-PLB171P
IC501: library part ADC101S051CIMF/NOPB, MANUF=TI, DESCR="IC ADC 10B 500KSPS SPI", MANUFCODE=ADC101S051CIMF/NOPB, POPULATE=YES, VENDOR=MOUSER, VENDORCODE=926-AD101S051CIMFNPB
IC600: MANUF=MICROCHIP, DESCR="IC LDO 2-30VIN 5VOUT 250mA", MANUFCODE=MIC2954-03WS-TR, POPULATE=YES, VENDOR=MOUSER, VENDORCODE=998-MIC2954-03WSTR
L600: library part SRN8040-4R7Y, INDUCTANCE=4.7UH, MANUF=BOURNS, RESISTANCE=R024, DESCR="INDUCTOR 04U7 4A1 R024 SMD", IMAX=4A1, MANUFCODE=SRN8040-4R7Y, POPULATE=YES, TYPE=INDUCTOR, VENDOR=MOUSER, VENDORCODE=652-SRN8040-4R7Y
PIN: library part P25-0123, MANUF=HARWIN, DESCR="POGO PIN 15X5MM", MANUFCODE=P25-0123, POPULATE=YES, VENDOR=MOUSER, VENDORCODE=855-P25-0123
R100: library part CRCW060333K0FKEA, "Resistor", MANUF=VISHAY, NPOWER=0.1, NTEMPCOEFF=100, NTOLERANCE=0.01, NVALUE=33000000, NVOLTAGE=75, PACKAGE=0603, POWER=0.1W, TEMPCOEFF=100PPM, TOLERANCE=1%, VALUE_4C=33K0, VOLTAGE=75V, DESCR="RES 33K0 0603 0.1W 1% 75V 100PPM", MANUFCODE=CRCW060333K0FKEA, POPULATE=YES, VALUE_MOHM=33000000, VENDOR=DIGI-KEY, VENDORCODE=541-33.0KHCT-ND
R101 R102 R105: library part CRCW060333R0FKEA, "Resistor", MANUF=VISHAY, NPOWER=0.1, NTEMPCOEFF=100, NTOLERANCE=0.01, NVALUE=33000, NVOLTAGE=75, PACKAGE=0603, POWER=0.1W, TEMPCOEFF=100PPM, TOLERANCE=1%, VALUE_4C=33R0, VOLTAGE=75V, DESCR="RES 33R0 0603 0.1W 1% 75V 100PPM", MANUFCODE=CRCW060333R0FKEA, POPULATE=YES, VALUE_MOHM=33000, VENDOR=DIGI-KEY, VENDORCODE=541-33.0HCT-ND
R103: library part CRCW060382K0FKEA, "Resistor", MANUF=VISHAY, NPOWER=0.1, NTEMPCOEFF=100, NTOLERANCE=0.01, NVALUE=82000000, NVOLTAGE=75, PACKAGE=0603, POWER=0.1W, TEMPCOEFF=100PPM, TOLERANCE=1%, VALUE_4C=82K0, VOLTAGE=75V, DESCR="RES 82K0 0603 0.1W 1% 75V 100PPM", MANUFCODE=CRCW060382K0FKEA, POPULATE=YES, VALUE_MOHM=82000000, VENDOR=DIGI-KEY, VENDORCODE=541-82.0KHCT-ND
R104: library part "MC 0.063W 0603 1% 1M", "Resistor", MANUF=MULTICOMP, NPOWER=0.063, NTEMPCOEFF=100, NTOLERANCE=0.01, NVALUE=1000000000, NVOLTAGE=50, PACKAGE=0603, POWER=0.063W, TEMPCOEFF=100PPM, TOLERANCE=1%, VALUE_4C=01M0, VOLTAGE=50V, DESCR="RES 01M0 0603 0.063W 1% 50V 100PPM", MANUFCODE="MC 0.063W 0603 1% 1M", POPULATE=YES, VALUE_MOHM=1000000000, VENDOR="FARNELL INONE", VENDORCODE=9330410
R200 R201: library part CRCW060310K0FKEA, "Resistor", MANUF=VISHAY, NPOWER=0.1, NTEMPCOEFF=100, NTOLERANCE=0.01, NVALUE=10000000, NVOLTAGE=75, PACKAGE=0603, POWER=0.1W, TEMPCOEFF=100PPM, TOLERANCE=1%, VALUE_4C=10K0, VOLTAGE=75V, DESCR="RES 10K0 0603 0.1W 1% 75V 100PPM", MANUFCODE=CRCW060310K0FKEA, POPULATE=YES, VALUE_MOHM=10000000, VENDOR=DIGI-KEY, VENDORCODE=541-10.0KHCT-ND
R202: library part CRCW060313K3FKEA, "Resistor", MANUF=VISHAY, NPOWER=0.1, NTEMPCOEFF=100, NTOLERANCE=0.01, NVALUE=13300000, NVOLTAGE=75, PACKAGE=0603, POWER=0.1W, TEMPCOEFF=100PPM, TOLERANCE=1%, VALUE_4C=13K3, VOLTAGE=75V, DESCR="RES 13K3 0603 0.1W 1% 75V 100PPM", MANUFCODE=CRCW060313K3FKEA, POPULATE=YES, VALUE_MOHM=13300000, VENDOR="FARNELL INONE", VENDORCODE=1652840
R203 R204 R206 R207: library part "MC 0.063W 0603 1% 1K", "Resistor", MANUF=MULTICOMP, NPOWER=0.063, NTEMPCOEFF=100, NTOLERANCE=0.01, NVALUE=1000000, NVOLTAGE=50, PACKAGE=0603, POWER=0.063W, TEMPCOEFF=100PPM, TOLERANCE=1%, VALUE_4C=01K0, VOLTAGE=50V, DESCR="RES 01K0 0603 0.063W 1% 50V 100PPM", MANUFCODE="MC 0.063W 0603 1% 1K", POPULATE=YES, VALUE_MOHM=1000000, VENDOR="FARNELL INONE", VENDORCODE=9330380
R205: library part RC0603FR-075K1L, "Resistor", MANUF=YAGEO, NTEMPCOEFF=100, NVALUE=5100000, NVOLTAGE=75, PACKAGE=603, POWER=0.1W, TEMPCOEFF=100PPM, TOLERANCE=1%, VALUE_4C=05K1, VOLTAGE=75V, DESCR="RES 05K1 0603 0.1W 1% 75V 100PPM", MANUFCODE=RC0603FR-075K1L, POPULATE=YES, VALUE_MOHM=5100000, VENDOR=DIGI-KEY, VENDORCODE=311-5.10KHRCT-ND
R208 R209 R210 R604: library part CRCW06030000Z0EA, "Resistor", MANUF=VISHAY, NPOWER=0.1, NTEMPCOEFF=100, NTOLERANCE=0.01, NVALUE=0, NVOLTAGE=75, PACKAGE=0603, POWER=0.1W, TEMPCOEFF=100PPM, TOLERANCE=1%, VALUE_4C=000R, VOLTAGE=75V, DESCR="RES 000R 0603 0.1W 1% 75V 100PPM", MANUFCODE=CRCW06030000Z0EA, VALUE_MOHM=0, VENDOR=DIGI-KEY, VENDORCODE=541-0.0GTR-ND
  R208 R209 R210: POPULATE=DNP
  R604: POPULATE=YES
R211: library part ERA3AEB471V, "Resistor", MANUF=PANASONIC, NPOWER=0.1, NTEMPCOEFF=25, NTOLERANCE=0.001, NVALUE=470000, NVOLTAGE=75, PACKAGE=0603, POWER=0.1W, TEMPCOEFF=25PPM, TOLERANCE=0.1%, VALUE_4C=470R, VOLTAGE=75V, DESCR="RES 470R 0603 0.1W 0.1% 75V 25PPM", MANUFCODE=ERA3AEB471V, POPULATE=DNP, VALUE_MOHM=470000, VENDOR="FARNELL INONE", VENDORCODE=1577601
R400: library part "MC 0.063W 0603 1% 5K1", "Resistor", MANUF=MULTICOMP, NPOWER=0.063, NTEMPCOEFF=100, NTOLERANCE=0.01, NVALUE=5100000, NVOLTAGE=50, PACKAGE=0603, POWER=0.063W, TEMPCOEFF=100PPM, TOLERANCE=1%, VALUE_4C=05K1, VOLTAGE=50V, DESCR="RES 05K1 0603 0.063W 1% 50V 100PPM", MANUFCODE="MC 0.063W 0603 1% 5K1", POPULATE=YES, VALUE_MOHM=5100000, VENDOR="FARNELL INONE", VENDORCODE=9331301
R401 R402: library part "MC 0.063W 0603 1% 5K6", "Resistor", MANUF=MULTICOMP, NPOWER=0.063, NTEMPCOEFF=100, NTOLERANCE=0.01, NVALUE=5600000, NVOLTAGE=50, PACKAGE=0603, POWER=0.063W, TEMPCOEFF=100PPM, TOLERANCE=1%, VALUE_4C=05K6, VOLTAGE=50V, DESCR="RES 05K6 0603 0.063W 1% 50V 100PPM", MANUFCODE="MC 0.063W 0603 1% 5K6", POPULATE=YES, VALUE_MOHM=5600000, VENDOR="FARNELL INONE", VENDORCODE=9331352
R403 R404 R500: library part CRCW0603120RFKEA, "Resistor", MANUF=VISHAY, NPOWER=0.1, NTEMPCOEFF=100, NTOLERANCE=0.01, NVALUE=120000, NVOLTAGE=75, PACKAGE=0603, POWER=0.1W, TEMPCOEFF=100PPM, TOLERANCE=1%, VALUE_4C=120R, VOLTAGE=75V, DESCR="RES 120R 0603 0.1W 1% 75V 100PPM", MANUFCODE=CRCW0603120RFKEA, POPULATE=YES, VALUE_MOHM=120000, VENDOR=DIGI-KEY, VENDORCODE=541-120HCT-ND
R501: library part CRHA1210AF100MFKEF, "Resistor", MANUF=VISHAY, NPOWER=0.45, NTEMPCOEFF=100, NTOLERANCE=0.01, NVALUE=10000000000, NVOLTAGE=1750, PACKAGE=1210, POWER=0.45W, TEMPCOEFF=100PPM, TOLERANCE=1%, VALUE_4C=100M, VOLTAGE=1750V, DESCR="RES 100M 1210 0.45W 1% 1750V 100PPM", MANUFCODE=CRHA1210AF100MFKEF, POPULATE=YES, VALUE_MOHM=10000000000, VENDOR=MOUSER, VENDORCODE=71-CRHA1210A100MFKEF
R502: library part RCV12061M00FKEAAT, "Resistor", MANUF=VISHAY, NPOWER=0.25, NTEMPCOEFF=100, NTOLERANCE=0.01, NVALUE=100000000, NVOLTAGE=800, PACKAGE=1210, POWER=0.25W, TEMPCOEFF=100PPM, TOLERANCE=1%, VALUE_4C=01M0, VOLTAGE=800V, DESCR="RES 1M 1210 0.25W 1% 800V 100PPM", MANUFCODE=RCV12061M00FKEAAT, POPULATE=YES, VALUE_MOHM=100000000, VENDOR=MOUSER, VENDORCODE=71-RCV12061M00FKEAAT
R600: library part CRCW06034K70JNEAC, "Resistor", MANUF=VISHAY, NPOWER=0.1, NTEMPCOEFF=200, NTOLERANCE=0.05, NVALUE=4700000, NVOLTAGE=75, PACKAGE=0603, POWER=0.1W, TEMPCOEFF=200PPM, TOLERANCE=5%, VALUE_4C=04K7, VOLTAGE=75V, DESCR="RES 04K7 0603 0.1W 5% 75V 200PPM", MANUFCODE=CRCW06034K70JNEAC, POPULATE=YES, VALUE_MOHM=4700000, VENDOR=DIGI-KEY, VENDORCODE=541-3993-1-ND
R601: library part CRCW0603680KFKEA, "Resistor", MANUF=VISHAY, NPOWER=0.1, NTEMPCOEFF=100, NTOLERANCE=0.01, NVALUE=680000000, NVOLTAGE=75, PACKAGE=0603, POWER=0.1W, TEMPCOEFF=100PPM, TOLERANCE=1%, VALUE_4C=680K, VOLTAGE=75V, DESCR="RES 680K 0603 0.1W 1% 75V 100PPM", MANUFCODE=CRCW0603680KFKEA, POPULATE=DNP, VALUE_MOHM=680000000, VENDOR=DIGI-KEY, VENDORCODE=541-680KHCT-ND
R602 R605: library part "MC 0.063W 0603 1% 100K", "Resistor", MANUF=MULTICOMP, NPOWER=0.063, NTEMPCOEFF=100, NTOLERANCE=0.01, NVALUE=100000000, NVOLTAGE=50, PACKAGE=0603, POWER=0.063W, TEMPCOEFF=100PPM, TOLERANCE=1%, VALUE_4C=100K, VOLTAGE=50V, DESCR="RES 100K 0603 0.063W 1% 50V 100PPM", MANUFCODE="MC 0.063W 0603 1% 100K", VALUE_MOHM=100000000, VENDOR="FARNELL INONE", VENDORCODE=9330402
  R602: POPULATE=YES
  R605: POPULATE=DNP
R603: library part MC0063W0603110K5, "Resistor", MANUF=MULTICOMP, NPOWER=0.063, NTEMPCOEFF=100, NTOLERANCE=0.01, NVALUE=10500000, NVOLTAGE=50, PACKAGE=0603, POWER=0.063W, TEMPCOEFF=100PPM, TOLERANCE=1%, VALUE_4C=10K5, VOLTAGE=50V, DESCR="RES 10K5 0603 0.063W 1% 50V 100PPM", MANUFCODE=MC0063W0603110K5, POPULATE=YES, VALUE_MOHM=10500000, VENDOR="FARNELL INONE", VENDORCODE=2130940
R606: library part CRCW060347K0FKEA, "Resistor", MANUF=VISHAY, NPOWER=0.1, NTEMPCOEFF=100, NTOLERANCE=0.01, NVALUE=47000000, NVOLTAGE=75, PACKAGE=0603, POWER=0.1W, TEMPCOEFF=100PPM, TOLERANCE=1%, VALUE_4C=47K0, VOLTAGE=75V, DESCR="RES 47K0 0603 0.1W 1% 75V 100PPM", MANUFCODE=CRCW060347K0FKEA, POPULATE=YES, VALUE_MOHM=47000000, VENDOR=DIGI-KEY, VENDORCODE=541-47.0KHCT-ND
R607: library part CRCW06031K10FKEA, "Resistor", MANUF=VISHAY, NPOWER=0.1, NTEMPCOEFF=100, NTOLERANCE=0.01, NVALUE=1100000, NVOLTAGE=75, PACKAGE=0603, POWER=0.1W, TEMPCOEFF=100PPM, TOLERANCE=1%, VALUE_4C=1K10, VOLTAGE=75V, DESCR="RES 1K10 0603 0.1W 1% 75V 100PPM", MANUFCODE=CRCW06031K10FKEA, POPULATE=DNP, VALUE_MOHM=1100000, VENDOR=DIGI-KEY, VENDORCODE=541-1.10KHCT-ND
R608: library part "MC 0.063W 0603 1% 4K99", "Resistor", MANUF=MULTICOMP, NPOWER=0.063, NTEMPCOEFF=100, NTOLERANCE=0.01, NVALUE=4990000, NVOLTAGE=50, PACKAGE=0603, POWER=0.063W, TEMPCOEFF=100PPM, TOLERANCE=1%, VALUE_4C=4K99, VOLTAGE=50V, DESCR="RES 4K99 0603 0.1W 1% 50V 100PPM", MANUFCODE="MC 0.063W 0603 1% 4K99", POPULATE=YES, VALUE_MOHM=4990000, VENDOR="FARNELL INONE", VENDORCODE=1170859
R_BLEED: library part RS01025K00FE73, "Resistor", MANUF=VISHAY, NPOWER=10, NTEMPCOEFF=20, NTOLERANCE=0.01, NVALUE=25000000, PACKAGE=AXIAL, POWER=10W, TEMPCOEFF=20PPM, TOLERANCE=1%, VALUE_4C=25K0, DESCR="RES 25K AXIAL 10W 1% 20PPM", MANUFCODE=RS01025K00FE73, POPULATE=YES, VALUE_MOHM=25000000, VENDOR=MOUSER, VENDORCODE=71-RS01025K00FE73
RST: library part FSM2JSMAATR, MANUF="TE CONNECTIVITY", DESCR="BTN 24V 4P SMD", MANUFCODE=FSM2JSMAATR, POPULATE=YES, VENDOR=MOUSER, VENDORCODE=506-FSM2JSMAATR
TR600: library part "TMR 1-1212", MANUF=TRACO, DESCR="IC TR 9-18 VIN 12 VOUT REG ISO 1W", MANUFCODE="TMR 1-1212", POPULATE=YES, VENDOR=MOUSER, VENDORCODE=495-TMR1-1212
TR601: library part "TSR 0.5-2433", MANUF=TRACO, DESCR="IC TR 4.75-32 VIN 3.3 VOUT 0.5A", MANUFCODE="TSR 0.5-2433", POPULATE=YES, VENDOR=MOUSER, VENDORCODE=495-TSR0.5-2433
TR602: library part "TDU 1-1212", MANUF=TRACO, DESCR="IC TR 10.8-13.2 VIN 12 VOUT ISO 1W", MANUFCODE="TDU 1-1212", POPULATE=YES, VENDOR=MOUSER, VENDORCODE=495-TDU1-1212
TVS100: library part SP3003-02JTG, MANUF=LITTELFUSE, PACKAGE=SC70_5, DESCR="DIODE TVS DUAL 0.65PF SC70-5", MANUFCODE=SP3003-02JTG, POPULATE=YES, QTY=DUAL, TYPE=TVS_BIDIR, VENDOR=DIGI-KEY, VENDORCODE=1827640
USB: library part 47642-0001, MANUF=MOLEX, DESCR="CON MICRO USB 5P SMD", MANUFCODE=47642-0001, POPULATE=YES, VENDOR=MOUSER, VENDORCODE=538-47642-0001
X200: library part ABS07-32.768KHZ-7-T, MANUF=ABRACON, DESCR="CRYSTAL 32.768KHZ 7PF 20PPM SMD", MANUFCODE=ABS07-32.768KHZ-7-T, POPULATE=DNP, VENDOR=MOUSER, VENDORCODE=815-ABS07-32.768K7T
X201: library part FC3BAEBDI8.0-T1, MANUF=ABRACON, DESCR="CRYSTAL 8MHZ 8PF 20PPM SMD", MANUFCODE=FC3BAEBDI8.0-T1, POPULATE=DNP, VENDOR=MOUSER, VENDORCODE=815-FC3BAEBDI8.0-T1
XP600: library part F05, MANUF="XP POWER", DESCR="IC DCDC 0.8-12VIN 0-500 VOUT 10W", MANUFCODE=F05, POPULATE=YES, VENDOR=MOUSER, VENDORCODE=209-F05
3V3 5V 12V AGND COM_N COM_P EN_BB EN_MD EN_SW MISO nCS nFLT SCK SCL SDA SET TP400 TP401 TP402 TP403 USB_M USB_P V_MEAS VBUS VCTRL VDDIN: DESCR="TESTPOINT 1.5MM", MANUFCODE=TP, POPULATE=NA
MH1 MH2 MH3 MH4: DESCR="MOUNTING HOLE", MANUFCODE=MH, POPULATE=NA

## Via types
v1: diameter 1, hole 0.5, Top Layer to Bottom Layer, 257 vias
v2: diameter 0.75, hole 0.35, Top Layer to Bottom Layer, 132 vias

## Nets (pads, with @x,y where several pads share a name; then routed paths per layer and width w, separated by ;. In a path a pad name is that pad's centre, name@x,y a point inside that pad or via, vN(x,y) a via of type N, cw(c..) or ccw(c..) an arc to the next point about the centre after c; other vN are vias at no path point)
+VBST: C402.2 IC402.38 TR602.5 | length 8.7
  Top Layer w0.2: IC402.38@198.385,61.15 198.385,61.885 198.9,62.4
  Top Layer w0.25: TR602.5@194.65,66.99 196.11,66.99 C402.2@197.95,65.15 198.9,64.2 198.9,62.4